# Altium PCB PCB1.PcbDoc (part 2 of 3)
Units mm, origin at the board's own origin, x right, y up, seen from the top; angles counter-clockwise.
Board outline 127.59 x 140.12 mm, 2 copper layers (Top Layer, Bottom Layer), stack 1.57 mm thick; 24 components, 13 nets, 167 pads, 3663 vias.
Unrouted connection lines stored in the file: 2.
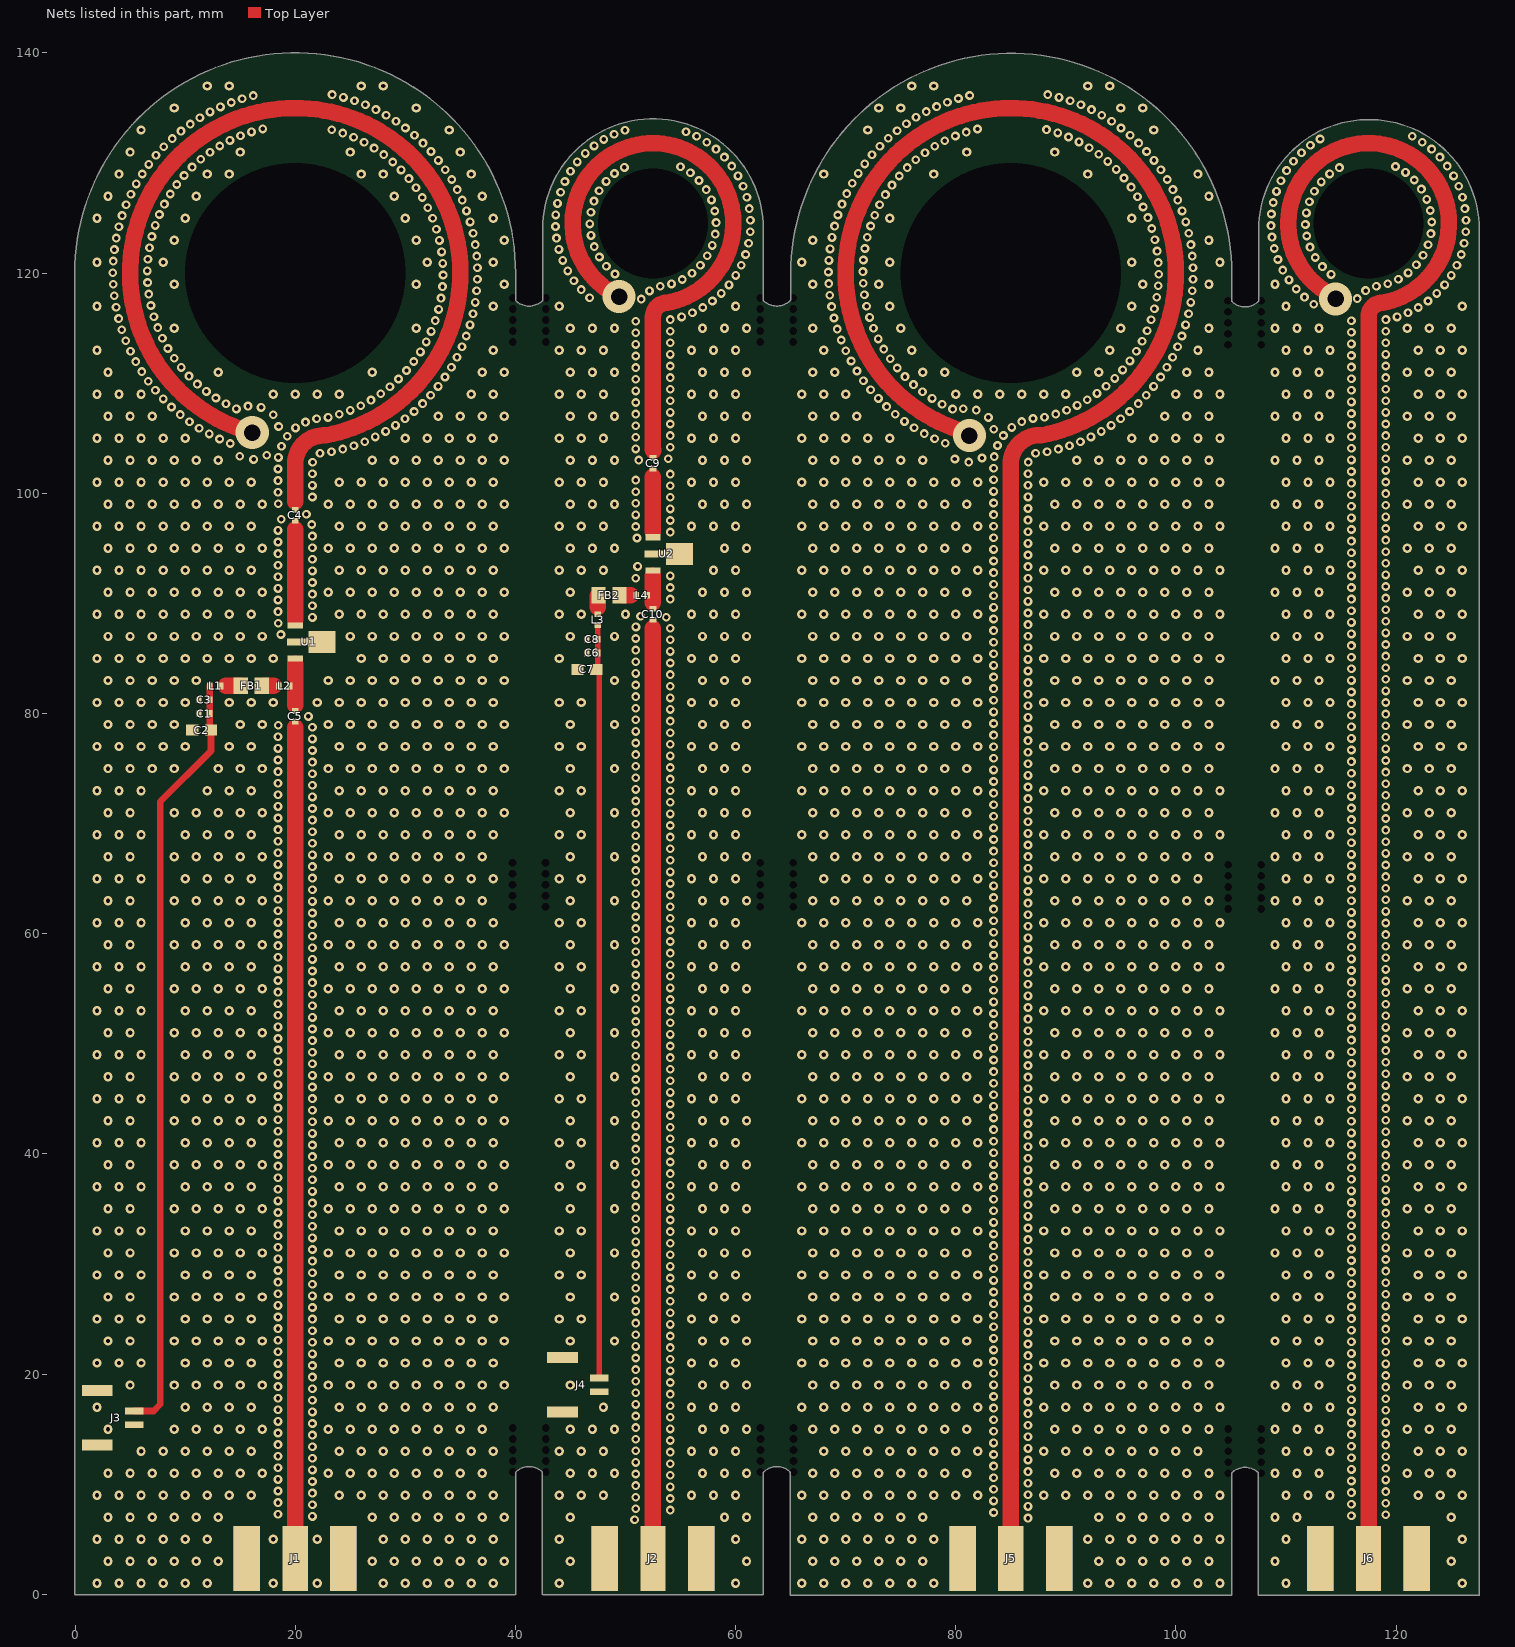
[diagram p2: the nets of this part, all layers, seen from the top]

## Via types
v1: diameter 0.85, hole 0.4, Top Layer to Bottom Layer, tented both sides, 2428 vias
v2: diameter 0.8, hole 0.4, Top Layer to Bottom Layer, tented both sides, 1231 vias
v3: diameter 3, hole 1.5, Top Layer to Bottom Layer, tented both sides, 4 vias

## Nets (pads, with @x,y where several pads share a name; then routed paths per layer and width w, separated by ;. In a path a pad name is that pad's centre, name@x,y a point inside that pad or via, vN(x,y) a via of type N, cw(c..) or ccw(c..) an arc to the next point about the centre after c; other vN are vias at no path point)
GND: C1.1 C2.1 C3.1 C4.2 C6.1 C7.1 C8.1 C9.2 J1.2 J2.2 J3.2 J3.MP1 J3.MP2 J4.2 J4.MP1 J4.MP2 J5.1 J5.2 J6.1 J6.2 pad.1@62.25,113.75 pad.1@65.25,113.75 U1.2 U2.2 | length 498.8
  Top Layer w0.5: C4.2@20,98.5 20,99.25
  Top Layer w1.5: v3(16.1,105.516) cw(c20,120) 22.749,105.254 22.565,105.254 ccw(c22.565,102.689) 20,102.689 20,99.25 ; v3(49.426,117.873) 49.415,117.884 cw(c52.5,124.5) 53.768,117.311 ccw(c53.768,116.043) 52.5,116.043 52.5,103.994 ccw(c54,103.994) 52.504,103.879 ; v3@81.1,105.516 cw(c85,120) 87.749,105.254 ; J5.1@85,3.25 85,102.681 cw(c87.592,102.681) 87.592,105.272 ; v3@114.415,117.884 cw(c117.5,124.5) 118.768,117.311 ccw(c118.768,116.043) 117.5,116.043 J6.1@117.5,3.25
  other v1: 2,1 4,1 6,1 8,1 10,1 12,1 18,1 22,1 28,1 30,1 32,1 34,1 36,1 38,1 44,1 60,1 66,1 68,1 70,1 72,1 74,1 76,1 78,1 92,1 94,1 96,1 98,1 100,1 102,1 104,1 110,1 126,1 3,3 5,3 7,3 9,3 11,3 13,3 27,3 29,3 31,3 33,3 35,3 37,3 39,3 45,3 61,3 67,3 69,3 71,3 73,3 75,3 77,3 93,3 95,3 97,3 99,3 101,3 103,3 109,3 125,3 2,5 4,5 6,5 8,5 10,5 12,5 18,5 22,5 28,5 30,5 32,5 34,5 36,5 38,5 44,5 60,5 66,5 68,5 70,5 72,5 74,5 76,5 78,5 92,5 94,5 96,5 98,5 100,5 102,5 104,5 110,5 126,5 3,7 5,7 7,7 9,7 11,7 13,7 27,7 29,7 31,7 33,7 35,7 37,7 39,7 45,7 59,7 61,7 67,7 69,7 71,7 73,7 75,7 77,7 93,7 95,7 97,7 99,7 101,7 103,7 109,7 111,7 125,7 2,9 4,9 6,9 8,9 10,9 12,9 14,9 16,9 24,9 26,9 28,9 30,9 32,9 34,9 36,9 38,9 44,9 46,9 48,9 56,9 58,9 60,9 66,9 68,9 70,9 72,9 74,9 76,9 78,9 80,9 82,9 88,9 90,9 92,9 94,9 96,9 98,9 100,9 102,9 104,9 110,9 112,9 114,9 122,9 124,9 126,9 3,11 5,11 7,11 9,11 11,11 13,11 15,11 17,11 23,11 25,11 27,11 29,11 31,11 33,11 35,11 37,11 45,11 47,11 49,11 57,11 59,11 61,11 67,11 69,11 71,11 73,11 75,11 77,11 79,11 81,11 89,11 91,11 93,11 95,11 97,11 99,11 101,11 103,11 109,11 111,11 113,11 121,11 123,11 125,11 6,13 8,13 10,13 12,13 14,13 16,13 24,13 26,13 28,13 30,13 32,13 34,13 36,13 38,13 44,13 46,13 48,13 56,13 58,13 60,13 68,13 70,13 72,13 74,13 76,13 78,13 80,13 82,13 88,13 90,13 92,13 94,13 96,13 98,13 100,13 102,13 110,13 112,13 114,13 122,13 124,13 126,13 3,15 9,15 11,15 13,15 15,15 17,15 23,15 25,15 27,15 29,15 31,15 33,15 35,15 37,15 45,15 47,15 49,15 57,15 59,15 61,15 67,15 69,15 71,15 73,15 75,15 77,15 79,15 81,15 89,15 91,15 93,15 95,15 97,15 99,15 101,15 103,15 109,15 111,15 113,15 121,15 123,15 125,15 2,17 10,17 12,17 14,17 16,17 24,17 26,17 28,17 30,17 32,17 34,17 36,17 38,17 48,17 56,17 58,17 60,17 66,17 68,17 70,17 72,17 74,17 76,17 78,17 80,17 82,17 88,17 90,17 92,17 94,17 96,17 98,17 100,17 102,17 104,17 110,17 112,17 114,17 122,17 124,17 126,17 5,19 9,19 11,19 13,19 15,19 17,19 23,19 25,19 27,19 29,19 31,19 33,19 35,19 37,19 39,19 45,19 57,19 59,19 61,19 67,19 69,19 71,19 73,19 75,19 77,19 79,19 81,19 89,19 91,19 93,19 95,19 97,19 99,19 101,19 103,19 109,19 111,19 113,19 121,19 123,19 125,19 2,21 4,21 6,21 10,21 12,21 14,21 16,21 24,21 26,21 28,21 30,21 32,21 34,21 36,21 38,21 56,21 58,21 60,21 66,21 68,21 70,21 72,21 74,21 76,21 78,21 80,21 82,21 88,21 90,21 92,21 94,21 96,21 98,21 100,21 102,21 104,21 110,21 112,21 114,21 122,21 124,21 126,21 3,23 5,23 9,23 11,23 13,23 15,23 17,23 23,23 25,23 27,23 29,23 31,23 33,23 35,23 37,23 39,23 45,23 49,23 57,23 59,23 61,23 67,23 69,23 71,23 73,23 75,23 77,23 79,23 81,23 89,23 91,23 93,23 95,23 97,23 99,23 101,23 103,23 109,23 111,23 113,23 121,23 123,23 125,23 2,25 4,25 6,25 10,25 12,25 14,25 16,25 24,25 26,25 28,25 30,25 32,25 34,25 36,25 38,25 44,25 46,25 56,25 58,25 60,25 66,25 68,25 70,25 72,25 74,25 76,25 78,25 80,25 82,25 88,25 90,25 92,25 94,25 96,25 98,25 100,25 102,25 104,25 110,25 112,25 114,25 122,25 124,25 126,25 3,27 5,27 9,27 11,27 13,27 15,27 17,27 23,27 25,27 27,27 29,27 31,27 33,27 35,27 37,27 39,27 45,27 49,27 57,27 59,27 61,27 67,27 69,27 71,27 73,27 75,27 77,27 79,27 81,27 89,27 91,27 93,27 95,27 97,27 99,27 101,27 103,27 109,27 111,27 113,27 121,27 123,27 125,27 2,29 4,29 6,29 10,29 12,29 14,29 16,29 24,29 26,29 28,29 30,29 32,29 34,29 36,29 38,29 44,29 46,29 56,29 58,29 60,29 66,29 68,29 70,29 72,29 74,29 76,29 78,29 80,29 82,29 88,29 90,29 92,29 94,29 96,29 98,29 100,29 102,29 104,29 110,29 112,29 114,29 122,29 124,29 126,29 3,31 5,31 9,31 11,31 13,31 15,31 17,31 23,31 25,31 27,31 29,31 31,31 33,31 35,31 37,31 39,31 45,31 49,31 57,31 59,31 61,31 67,31 69,31 71,31 73,31 75,31 77,31 79,31 81,31 89,31 91,31 93,31 95,31 97,31 99,31 101,31 103,31 109,31 111,31 113,31 121,31 123,31 125,31 2,33 4,33 6,33 10,33 12,33 14,33 16,33 24,33 26,33 28,33 30,33 32,33 34,33 36,33 38,33 44,33 46,33 56,33 58,33 60,33 66,33 68,33 70,33 72,33 74,33 76,33 78,33 80,33 82,33 88,33 90,33 92,33 94,33 96,33 98,33 100,33 102,33 104,33 110,33 112,33 114,33 122,33 124,33 126,33 3,35 5,35 9,35 11,35 13,35 15,35 17,35 23,35 25,35 27,35 29,35 31,35 33,35 35,35 37,35 39,35 45,35 49,35 57,35 59,35 61,35 67,35 69,35 71,35 73,35 75,35 77,35 79,35 81,35 89,35 91,35 93,35 95,35 97,35 99,35 101,35 103,35 109,35 111,35 113,35 121,35 123,35 125,35 2,37 4,37 6,37 10,37 12,37 14,37 16,37 24,37 26,37 28,37 30,37 32,37 34,37 36,37 38,37 44,37 46,37 56,37 58,37 60,37 66,37 68,37 70,37 72,37 74,37 76,37 78,37 80,37 82,37 88,37 90,37 92,37 94,37 96,37 98,37 100,37 102,37 104,37 110,37 112,37 114,37 122,37 124,37 126,37 3,39 5,39 9,39 11,39 13,39 15,39 17,39 23,39 25,39 27,39 29,39 31,39 33,39 35,39 37,39 39,39 45,39 49,39 57,39 59,39 61,39 67,39 69,39 71,39 73,39 75,39 77,39 79,39 81,39 89,39 91,39 93,39 95,39 97,39 99,39 101,39 103,39 109,39 111,39 113,39 121,39 123,39 125,39 2,41 4,41 6,41 10,41 12,41 14,41 16,41 24,41 26,41 28,41 30,41 32,41 34,41 36,41 38,41 44,41 46,41 56,41 58,41 60,41 66,41 68,41 70,41 72,41 74,41 76,41 78,41 80,41 82,41 88,41 90,41 92,41 94,41 96,41 98,41 100,41 102,41 104,41 110,41 112,41 114,41 122,41 124,41 126,41 3,43 5,43 9,43 11,43 13,43 15,43 17,43 23,43 25,43 27,43 29,43 31,43 33,43 35,43 37,43 39,43 45,43 49,43 57,43 59,43 61,43 67,43 69,43 71,43 73,43 75,43 77,43 79,43 81,43 89,43 91,43 93,43 95,43 97,43 99,43 101,43 103,43 109,43 111,43 113,43 121,43 123,43 125,43 2,45 4,45 6,45 10,45 12,45 14,45 16,45 24,45 26,45 28,45 30,45 32,45 34,45 36,45 38,45 44,45 46,45 56,45 58,45 60,45 66,45 68,45 70,45 72,45 74,45 76,45 78,45 80,45 82,45 88,45 90,45 92,45 94,45 96,45 98,45 100,45 102,45 104,45 110,45 112,45 114,45 122,45 124,45 126,45 3,47 5,47 9,47 11,47 13,47 15,47 17,47 23,47 25,47 27,47 29,47 31,47 33,47 35,47 37,47 39,47 45,47 49,47 57,47 59,47 61,47 67,47 69,47 71,47 73,47 75,47 77,47 79,47 81,47 89,47 91,47 93,47 95,47 97,47 99,47 101,47 103,47 109,47 111,47 113,47 121,47 123,47 125,47 2,49 4,49 6,49 10,49 12,49 14,49 16,49 24,49 26,49 28,49 30,49 32,49 34,49 36,49 38,49 44,49 46,49 56,49 58,49 60,49 66,49 68,49 70,49 72,49 74,49 76,49 78,49 80,49 82,49 88,49 90,49 92,49 94,49 96,49 98,49 100,49 102,49 104,49 110,49 112,49 114,49 122,49 124,49 126,49 3,51 5,51 9,51 11,51 13,51 15,51 17,51 23,51 25,51 27,51 29,51 31,51 33,51 35,51 37,51 39,51 45,51 49,51 57,51 59,51 61,51 67,51 69,51 71,51 73,51 75,51 77,51 79,51 81,51 89,51 91,51 93,51 95,51 97,51 99,51 101,51 103,51 109,51 111,51 113,51 121,51 123,51 125,51 2,53 4,53 6,53 10,53 12,53 14,53 16,53 24,53 26,53 28,53 30,53 32,53 34,53 36,53 38,53 44,53 46,53 56,53 58,53 60,53 66,53 68,53 70,53 72,53 74,53 76,53 78,53 80,53 82,53 88,53 90,53 92,53 94,53 96,53 98,53 100,53 102,53 104,53 110,53 112,53 114,53 122,53 124,53 126,53 3,55 5,55 9,55 11,55 13,55 15,55 17,55 23,55 25,55 27,55 29,55 31,55 33,55 35,55 37,55 39,55 45,55 49,55 57,55 59,55 61,55 67,55 69,55 71,55 73,55 75,55 77,55 79,55 81,55 89,55 91,55 93,55 95,55 97,55 99,55 101,55 103,55 109,55 111,55 113,55 121,55 123,55 125,55 2,57 4,57 6,57 10,57 12,57 14,57 16,57 24,57 26,57 28,57 30,57 32,57 34,57 36,57 38,57 44,57 46,57 56,57 58,57 60,57 66,57 68,57 70,57 72,57 74,57 76,57 78,57 80,57 82,57 88,57 90,57 92,57 94,57 96,57 98,57 100,57 102,57 104,57 110,57 112,57 114,57 122,57 124,57 126,57 3,59 5,59 9,59 11,59 13,59 15,59 17,59 23,59 25,59 27,59 29,59 31,59 33,59 35,59 37,59 39,59 45,59 49,59 57,59 59,59 61,59 67,59 69,59 71,59 73,59 75,59 77,59 79,59 81,59 89,59 91,59 93,59 95,59 97,59 99,59 101,59 103,59 109,59 111,59 113,59 121,59 123,59 125,59 2,61 4,61 6,61 10,61 12,61 14,61 16,61 24,61 26,61 28,61 30,61 32,61 34,61 36,61 38,61 44,61 46,61 56,61 58,61 60,61 66,61 68,61 70,61 72,61 74,61 76,61 78,61 80,61 82,61 88,61 90,61 92,61 94,61 96,61 98,61 100,61 102,61 104,61 110,61 112,61 114,61 122,61 124,61 126,61 3,63 5,63 9,63 11,63 13,63 15,63 17,63 23,63 25,63 27,63 29,63 31,63 33,63 35,63 37,63 45,63 49,63 57,63 59,63 61,63 67,63 69,63 71,63 73,63 75,63 77,63 79,63 81,63 89,63 91,63 93,63 95,63 97,63 99,63 101,63 103,63 109,63 111,63 113,63 121,63 123,63 125,63 2,65 4,65 6,65 10,65 12,65 14,65 16,65 24,65 26,65 28,65 30,65 32,65 34,65 36,65 38,65 44,65 46,65 56,65 58,65 60,65 68,65 70,65 72,65 74,65 76,65 78,65 80,65 82,65 88,65 90,65 92,65 94,65 96,65 98,65 100,65 102,65 110,65 112,65 114,65 122,65 124,65 126,65 3,67 5,67 9,67 11,67 13,67 15,67 17,67 23,67 25,67 27,67 29,67 31,67 33,67 35,67 37,67 45,67 49,67 57,67 59,67 61,67 67,67 69,67 71,67 73,67 75,67 77,67 79,67 81,67 89,67 91,67 93,67 95,67 97,67 99,67 101,67 103,67 109,67 111,67 113,67 121,67 123,67 125,67 2,69 4,69 6,69 10,69 12,69 14,69 16,69 24,69 26,69 28,69 30,69 32,69 34,69 36,69 38,69 44,69 46,69 56,69 58,69 60,69 66,69 68,69 70,69 72,69 74,69 76,69 78,69 80,69 82,69 88,69 90,69 92,69 94,69 96,69 98,69 100,69 102,69 104,69 110,69 112,69 114,69 122,69 124,69 126,69 3,71 5,71 9,71 11,71 13,71 15,71 17,71 23,71 25,71 27,71 29,71 31,71 33,71 35,71 37,71 39,71 45,71 49,71 57,71 59,71 61,71 67,71 69,71 71,71 73,71 75,71 77,71 79,71 81,71 89,71 91,71 93,71 95,71 97,71 99,71 101,71 103,71 109,71 111,71 113,71 121,71 123,71 125,71 2,73 4,73 6,73 12,73 14,73 16,73 24,73 26,73 28,73 30,73 32,73 34,73 36,73 38,73 44,73 46,73 56,73 58,73 60,73 66,73 68,73 70,73 72,73 74,73 76,73 78,73 80,73 82,73 88,73 90,73 92,73 94,73 96,73 98,73 100,73 102,73 104,73 110,73 112,73 114,73 122,73 124,73 126,73 3,75 5,75 7,75 9,75 13,75 15,75 17,75 23,75 25,75 27,75 29,75 31,75 33,75 35,75 37,75 39,75 45,75 49,75 57,75 59,75 61,75 67,75 69,75 71,75 73,75 75,75 77,75 79,75 81,75 89,75 91,75 93,75 95,75 97,75 99,75 101,75 103,75 109,75 111,75 113,75 121,75 123,75 125,75 2,77 4,77 6,77 8,77 10,77 14,77 16,77 24,77 26,77 28,77 30,77 32,77 34,77 36,77 38,77 44,77 46,77 56,77 58,77 60,77 66,77 68,77 70,77 72,77 74,77 76,77 78,77 80,77 82,77 88,77 90,77 92,77 94,77 96,77 98,77 100,77 102,77 104,77 110,77 112,77 114,77 122,77 124,77 126,77 3,79 5,79 7,79 9,79 15,79 17,79 23,79 25,79 27,79 29,79 31,79 33,79 35,79 37,79 39,79 45,79 49,79 57,79 59,79 61,79 67,79 69,79 71,79 73,79 75,79 77,79 79,79 81,79 89,79 91,79 93,79 95,79 97,79 99,79 101,79 103,79 109,79 111,79 113,79 121,79 123,79 125,79 2,81 4,81 6,81 8,81 10,81 14,81 16,81 18,81 22,81 24,81 26,81 28,81 30,81 32,81 34,81 36,81 38,81 44,81 46,81 56,81 58,81 60,81 66,81 68,81 70,81 72,81 74,81 76,81 78,81 80,81 82,81 88,81 90,81 92,81 94,81 96,81 98,81 100,81 102,81 104,81 110,81 112,81 114,81 122,81 124,81 126,81 3,83 5,83 7,83 9,83 11,83 23,83 25,83 27,83 29,83 31,83 33,83 35,83 37,83 39,83 49,83 57,83 59,83 61,83 67,83 69,83 71,83 73,83 75,83 77,83 79,83 81,83 89,83 91,83 93,83 95,83 97,83 99,83 101,83 103,83 109,83 111,83 113,83 121,83 123,83 125,83 2,85 4,85 6,85 8,85 10,85 12,85 14,85 16,85 18,85 26,85 28,85 30,85 32,85 34,85 36,85 38,85 44,85 56,85 58,85 60,85 66,85 68,85 70,85 72,85 74,85 76,85 78,85 80,85 82,85 88,85 90,85 92,85 94,85 96,85 98,85 100,85 102,85 104,85 110,85 112,85 114,85 122,85 124,85 126,85 3,87 5,87 7,87 9,87 11,87 13,87 15,87 17,87 25,87 27,87 29,87 31,87 33,87 35,87 37,87 39,87 45,87 49,87 57,87 59,87 61,87 67,87 69,87 71,87 73,87 75,87 77,87 79,87 81,87 89,87 91,87 93,87 95,87 97,87 99,87 101,87 103,87 109,87 111,87 113,87 121,87 123,87 125,87 2,89 4,89 6,89 8,89 10,89 12,89 14,89 16,89 24,89 26,89 28,89 30,89 32,89 34,89 36,89 38,89 44,89 46,89 50,89 56,89 58,89 60,89 66,89 68,89 70,89 72,89 74,89 76,89 78,89 80,89 82,89 88,89 90,89 92,89 94,89 96,89 98,89 100,89 102,89 104,89 110,89 112,89 114,89 122,89 124,89 126,89 3,91 5,91 7,91 9,91 11,91 13,91 15,91 17,91 23,91 25,91 27,91 29,91 31,91 33,91 35,91 37,91 39,91 45,91 57,91 59,91 61,91 67,91 69,91 71,91 73,91 75,91 77,91 79,91 81,91 89,91 91,91 93,91 95,91 97,91 99,91 101,91 103,91 109,91 111,91 113,91 121,91 123,91 125,91 2,93 4,93 6,93 8,93 10,93 12,93 14,93 16,93 24,93 26,93 28,93 30,93 32,93 34,93 36,93 38,93 44,93 46,93 48,93 58,93 60,93 66,93 68,93 70,93 72,93 74,93 76,93 78,93 80,93 82,93 88,93 90,93 92,93 94,93 96,93 98,93 100,93 102,93 104,93 110,93 112,93 114,93 122,93 124,93 126,93 3,95 5,95 7,95 9,95 11,95 13,95 15,95 17,95 23,95 25,95 27,95 29,95 31,95 33,95 35,95 37,95 39,95 45,95 47,95 49,95 59,95 61,95 67,95 69,95 71,95 73,95 75,95 77,95 79,95 81,95 89,95 91,95 93,95 95,95 97,95 99,95 101,95 103,95 109,95 111,95 113,95 121,95 123,95 125,95 2,97 4,97 6,97 8,97 10,97 12,97 14,97 16,97 24,97 26,97 28,97 30,97 32,97 34,97 36,97 38,97 44,97 46,97 48,97 56,97 58,97 60,97 66,97 68,97 70,97 72,97 74,97 76,97 78,97 80,97 82,97 88,97 90,97 92,97 94,97 96,97 98,97 100,97 102,97 104,97 110,97 112,97 114,97 122,97 124,97 126,97 3,99 5,99 7,99 9,99 11,99 13,99 15,99 17,99 23,99 25,99 27,99 29,99 31,99 33,99 35,99 37,99 39,99 45,99 47,99 49,99 57,99 59,99 61,99 67,99 69,99 71,99 73,99 75,99 77,99 79,99 81,99 89,99 91,99 93,99 95,99 97,99 99,99 101,99 103,99 109,99 111,99 113,99 121,99 123,99 125,99 2,101 4,101 6,101 8,101 10,101 12,101 14,101 16,101 24,101 26,101 28,101 30,101 32,101 34,101 36,101 38,101 44,101 46,101 48,101 56,101 58,101 60,101 66,101 68,101 70,101 72,101 74,101 76,101 78,101 80,101 82,101 88,101 90,101 92,101 94,101 96,101 98,101 100,101 102,101 104,101 110,101 112,101 114,101 122,101 124,101 126,101 3,103 5,103 7,103 9,103 11,103 13,103 27,103 29,103 31,103 33,103 35,103 37,103 39,103 45,103 47,103 49,103 57,103 59,103 61,103 67,103 69,103 71,103 73,103 75,103 77,103 91,103 93,103 95,103 97,103 99,103 101,103 103,103 109,103 111,103 113,103 121,103 123,103 125,103 2,105 4,105 6,105 8,105 10,105 30,105 32,105 34,105 36,105 38,105 44,105 46,105 48,105 56,105 58,105 60,105 66,105 68,105 70,105 72,105 74,105 96,105 98,105 100,105 102,105 104,105 110,105 112,105 114,105 122,105 124,105 126,105 3,107 5,107 7,107 33,107 35,107 37,107 39,107 45,107 47,107 49,107 57,107 59,107 61,107 67,107 69,107 71,107 99,107 101,107 103,107 109,107 111,107 113,107 121,107 123,107 125,107 2,109 4,109 6,109 18,109 20,109 22,109 24,109 36,109 38,109 44,109 46,109 48,109 56,109 58,109 60,109 66,109 68,109 70,109 80,109 82,109 84,109 86,109 88,109 90,109 100,109 102,109 104,109 110,109 112,109 114,109 122,109 124,109 126,109 3,111 13,111 27,111 37,111 39,111 45,111 47,111 49,111 57,111 59,111 61,111 67,111 69,111 77,111 79,111 91,111 93,111 101,111 103,111 109,111 111,111 113,111 121,111 123,111 125,111 2,113 38,113 44,113 46,113 48,113 56,113 58,113 60,113 68,113 76,113 94,113 102,113 110,113 112,113 114,113 122,113 124,113 126,113 9,115 31,115 45,115 47,115 49,115 57,115 59,115 61,115 67,115 75,115 95,115 103,115 109,115 111,115 113,115 121,115 123,115 125,115 2,117 38,117 44,117 60,117 74,117 96,117 110,117 126,117 9,119 31,119 39,119 67,119 73,119 97,119 103,119 109,119 2,121 8,121 32,121 38,121 66,121 74,121 96,121 104,121 9,123 31,123 39,123 67,123 103,123 2,125 10,125 30,125 38,125 74,125 96,125 3,127 11,127 29,127 37,127 103,127 4,129 12,129 14,129 26,129 28,129 36,129 68,129 78,129 92,129 102,129 5,131 15,131 25,131 35,131 81,131 89,131 6,133 34,133 72,133 98,133 9,135 31,135 73,135 75,135 95,135 97,135 12,137 14,137 26,137 28,137 76,137 78,137 92,137 94,137
  other v2: 50.83,6.763 86.563,6.92 21.563,7.075 115.937,7.123 119.063,7.219 18.437,7.268 83.437,7.425 54.063,7.643 50.937,7.76 86.563,7.974 21.563,8.129 115.937,8.177 119.063,8.273 18.437,8.322 83.437,8.479 54.063,8.697 50.937,8.814 86.563,9.028 21.563,9.183 115.937,9.231 119.063,9.327 18.437,9.376 83.437,9.533 54.063,9.751 50.937,9.868 86.563,10.082 21.563,10.237 115.937,10.285 119.063,10.381 18.437,10.43 83.437,10.587 54.063,10.805 50.937,10.922 86.563,11.136 21.563,11.291 115.937,11.339 119.063,11.435 18.437,11.484 83.437,11.641 54.063,11.859 50.937,11.976 86.563,12.19 21.563,12.345 115.937,12.393 119.063,12.489 18.437,12.538 83.437,12.695 54.063,12.913 50.937,13.03 86.563,13.244 21.563,13.399 115.937,13.447 119.063,13.543 18.437,13.592 83.437,13.749 54.063,13.967 50.937,14.084 86.563,14.298 21.563,14.453 115.937,14.501 119.063,14.597 18.437,14.646 83.437,14.803 54.063,15.021 50.937,15.138 86.563,15.352 21.563,15.507 115.937,15.555 119.063,15.651 18.437,15.7 83.437,15.857 54.063,16.075 50.937,16.192 86.563,16.406 21.563,16.561 115.937,16.609 119.063,16.705 18.437,16.754 83.437,16.911 54.063,17.129 50.937,17.246 86.563,17.46 21.563,17.615 115.937,17.663 119.063,17.759 18.437,17.808 83.437,17.965 54.063,18.183 50.937,18.3 86.563,18.514 21.563,18.669 115.937,18.717 119.063,18.813 18.437,18.862 83.437,19.019 54.063,19.237 50.937,19.354 86.563,19.568 21.563,19.723 115.937,19.771 119.063,19.867 18.437,19.916 83.437,20.073 54.063,20.291 50.937,20.408 86.563,20.622 21.563,20.777 115.937,20.825 119.063,20.921 18.437,20.97 83.437,21.127 54.063,21.345 50.937,21.462 86.563,21.676 21.563,21.831 115.937,21.879 119.063,21.975 18.437,22.024 83.437,22.181 54.063,22.399 50.937,22.516 86.563,22.73 21.563,22.885 115.937,22.933 119.063,23.029 18.437,23.078 83.437,23.235 54.063,23.453 50.937,23.57 86.563,23.784 21.563,23.939 115.937,23.987 119.063,24.083 18.437,24.132 83.437,24.289 54.063,24.507 50.937,24.624 86.563,24.838 21.563,24.993 115.937,25.041 119.063,25.137 18.437,25.186 83.437,25.343 54.063,25.561 50.937,25.678 86.563,25.892 21.563,26.047 115.937,26.095 119.063,26.191 18.437,26.24 83.437,26.397 54.063,26.615 50.937,26.732 86.563,26.946 21.563,27.101 115.937,27.149 119.063,27.245 18.437,27.294 83.437,27.451 54.063,27.669 50.937,27.786 86.563,28 21.563,28.155 115.937,28.203 119.063,28.299 18.437,28.348 83.437,28.505 54.063,28.723 50.937,28.84 86.563,29.054 21.563,29.209 115.937,29.257 119.063,29.353 18.437,29.402 83.437,29.559 54.063,29.777 50.937,29.894 86.563,30.108 21.563,30.263 115.937,30.311 119.063,30.407 18.437,30.456 83.437,30.613 54.063,30.831 50.937,30.948 86.563,31.162 21.563,31.317 115.937,31.365 119.063,31.461 18.437,31.51 83.437,31.667 54.063,31.885 50.937,32.002 86.563,32.216 21.563,32.371 115.937,32.419 119.063,32.515 18.437,32.564 83.437,32.721 54.063,32.939 50.937,33.056 86.563,33.27 21.563,33.425 115.937,33.473 119.063,33.569 18.437,33.618 83.437,33.775 54.063,33.993 50.937,34.11 86.563,34.324 21.563,34.479 115.937,34.527 119.063,34.623 18.437,34.672 83.437,34.829 54.063,35.047 50.937,35.164 86.563,35.378 21.563,35.533 115.937,35.581 119.063,35.677 18.437,35.726 83.437,35.883 54.063,36.101 50.937,36.218 86.563,36.432 21.563,36.587 115.937,36.635 119.063,36.731 18.437,36.78 83.437,36.937 54.063,37.155 50.937,37.272 86.563,37.486 21.563,37.641 115.937,37.689 119.063,37.785 18.437,37.834 83.437,37.991 54.063,38.209 50.937,38.326 86.563,38.54 21.563,38.695 115.937,38.743 119.063,38.839 18.437,38.888 83.437,39.045 54.063,39.263 50.937,39.38 86.563,39.594 21.563,39.749 115.937,39.797 119.063,39.893 18.437,39.942 83.437,40.099 54.063,40.317 50.937,40.434 86.563,40.648 21.563,40.803 115.937,40.851 119.063,40.947 18.437,40.996 83.437,41.153 54.063,41.371 50.937,41.488 86.563,41.702 21.563,41.857 115.937,41.905 119.063,42.001 18.437,42.05 83.437,42.207 54.063,42.425 50.937,42.542 86.563,42.756 21.563,42.911 115.937,42.959 119.063,43.055 18.437,43.104 83.437,43.261 54.063,43.479 50.937,43.596 86.563,43.81 21.563,43.965 115.937,44.013 119.063,44.109 18.437,44.158 83.437,44.315 54.063,44.533 50.937,44.65 86.563,44.864 21.563,45.019 115.937,45.067 119.063,45.163 18.437,45.212 83.437,45.369 54.063,45.587 50.937,45.704 86.563,45.918 21.563,46.073 115.937,46.121 119.063,46.217 18.437,46.266 83.437,46.423 54.063,46.641 50.937,46.758 86.563,46.972 21.563,47.127 115.937,47.175 119.063,47.271 18.437,47.32 83.437,47.477 54.063,47.695 50.937,47.812 86.563,48.026 21.563,48.181 115.937,48.229 119.063,48.325 18.437,48.374 83.437,48.531 54.063,48.749 50.937,48.866 86.563,49.08 21.563,49.235 115.937,49.283 119.063,49.379 18.437,49.428 83.437,49.585 54.063,49.803 50.937,49.92 86.563,50.134 21.563,50.289 115.937,50.337 119.063,50.433 18.437,50.482 83.437,50.639 54.063,50.857 50.937,50.974 86.563,51.188 21.563,51.343 115.937,51.391 119.063,51.487 18.437,51.536 83.437,51.693 54.063,51.911 50.937,52.028 86.563,52.242 21.563,52.397 115.937,52.445 119.063,52.541 18.437,52.59 83.437,52.747 54.063,52.965 50.937,53.082 86.563,53.296 21.563,53.451 115.937,53.499 119.063,53.595 18.437,53.644 83.437,53.801 54.063,54.019 50.937,54.136 86.563,54.35 21.563,54.505 115.937,54.553 119.063,54.649 18.437,54.698 83.437,54.855 54.063,55.073 50.937,55.19 86.563,55.404 21.563,55.559 115.937,55.607 119.063,55.703 18.437,55.752 83.437,55.909 54.063,56.127 50.937,56.244 86.563,56.458 21.563,56.613 115.937,56.661 119.063,56.757 18.437,56.806 83.437,56.963 54.063,57.181 50.937,57.298 86.563,57.512 21.563,57.667 115.937,57.715 119.063,57.811 18.437,57.86 83.437,58.017 54.063,58.235 50.937,58.352 86.563,58.566 21.563,58.721 115.937,58.769 119.063,58.865 18.437,58.914 83.437,59.071 54.063,59.289 50.937,59.406 86.563,59.62 21.563,59.775 115.937,59.823 119.063,59.919 18.437,59.968 83.437,60.125 54.063,60.343 50.937,60.46 86.563,60.674 21.563,60.829 115.937,60.877 119.063,60.973 18.437,61.022 83.437,61.179 54.063,61.397 50.937,61.514 86.563,61.728 21.563,61.883 115.937,61.931 119.063,62.027 18.437,62.076 83.437,62.233 54.063,62.451 50.937,62.568 86.563,62.782 21.563,62.937 115.937,62.985 119.063,63.081 18.437,63.13 83.437,63.287 54.063,63.505 50.937,63.622 86.563,63.836 21.563,63.991 115.937,64.039 119.063,64.135 18.437,64.184 83.437,64.341 54.063,64.559 50.937,64.676 86.563,64.89 21.563,65.045 115.937,65.093 119.063,65.189 18.437,65.238 83.437,65.395 54.063,65.613 50.937,65.73 86.563,65.944 21.563,66.099 115.937,66.147 119.063,66.243 18.437,66.292 83.437,66.449 54.063,66.667 50.937,66.784 86.563,66.998 21.563,67.153 115.937,67.201 119.063,67.297 18.437,67.346 83.437,67.503 54.063,67.721 50.937,67.838 86.563,68.052 21.563,68.207 115.937,68.255 119.063,68.351 18.437,68.4 83.437,68.557 54.063,68.775 50.937,68.892 86.563,69.106 21.563,69.261 115.937,69.309 119.063,69.405 18.437,69.454 83.437,69.611 54.063,69.829 50.937,69.946 86.563,70.16 21.563,70.315 115.937,70.363 119.063,70.459 18.437,70.508 83.437,70.665 54.063,70.883 50.937,71 86.563,71.214 21.563,71.369 115.937,71.417 119.063,71.513 18.437,71.562 83.437,71.719 54.063,71.937 50.937,72.054 86.563,72.268 21.563,72.423 115.937,72.471 119.063,72.567 18.437,72.616 83.437,72.773 54.063,72.991 50.937,73.108 86.563,73.322 21.563,73.477 115.937,73.525 119.063,73.621 18.437,73.67 83.437,73.827 54.063,74.045 50.937,74.162 86.563,74.376 21.563,74.531 115.937,74.579 119.063,74.675 18.437,74.724 83.437,74.881 54.063,75.099 50.937,75.216 86.563,75.43 21.563,75.585 115.937,75.633 119.063,75.729 18.437,75.778 83.437,75.935 54.063,76.153 50.937,76.27 86.563,76.484 21.563,76.639 115.937,76.687 119.063,76.783 18.437,76.832 83.437,76.989 54.063,77.207 50.937,77.324 86.563,77.538 21.563,77.693 115.937,77.741 119.063,77.837 18.437,77.886 83.437,78.043 54.063,78.261 50.937,78.378 86.563,78.592 21.563,78.747 115.937,78.795 119.063,78.891 18.455,78.94 83.437,79.097 54.063,79.315 50.937,79.432 86.563,79.646 21.205,79.738 115.937,79.849 119.063,79.945 83.437,80.151 54.063,80.369 50.937,80.486 86.563,80.7 115.937,80.903 119.063,80.999 83.437,81.205 54.063,81.423 50.937,81.54 86.563,81.754 115.937,81.957 119.063,82.053 83.437,82.259 54.063,82.477 50.937,82.594 86.563,82.808 115.937,83.011 119.063,83.107 83.437,83.313 54.063,83.531 50.937,83.648 86.563,83.862 115.937,84.065 119.063,84.161 83.437,84.367 54.063,84.585 50.937,84.702 86.563,84.916 115.937,85.119 119.063,85.215 83.437,85.421 54.063,85.639 50.937,85.756 86.563,85.97 115.937,86.173 119.063,86.269 83.437,86.475 54.063,86.693 50.937,86.81 86.563,87.024 18.704,87.178 115.937,87.227 119.063,87.323 83.437,87.529 54.063,87.747 50.945,87.864 86.563,88.078 18.468,88.205 115.937,88.281 119.063,88.377 83.437,88.583 21.563,88.734 53.705,88.738 51.375,88.826 86.563,89.132 18.437,89.259 115.937,89.335 119.063,89.431 83.437,89.637 21.563,89.788 86.563,90.186 18.437,90.313 54.063,90.389 115.937,90.389 119.063,90.485 83.437,90.691 21.563,90.842 86.563,91.24 18.437,91.367 54.063,91.443 115.937,91.443 119.063,91.539 83.437,91.745 21.563,91.896 50.937,92.279 86.563,92.294 18.437,92.421 54.063,92.497 115.937,92.497 119.063,92.593 83.437,92.799 21.563,92.95 51.102,93.359 86.563,93.348 18.437,93.475 115.937,93.551 119.063,93.647 83.437,93.853 21.563,94.004 86.563,94.402 18.437,94.529 115.937,94.605 119.063,94.701 83.437,94.907 21.563,95.058 86.563,95.456 18.437,95.583 115.937,95.659 119.063,95.755 51.046,95.942 83.437,95.961 21.563,96.112 54.06,96.477 86.563,96.51 18.437,96.637 115.937,96.713 119.063,96.809 50.937,96.99 83.437,97.015 21.5,97.165 54.063,97.531 86.563,97.564 18.728,97.65 115.937,97.767 119.063,97.863 50.937,98.044 83.437,98.069 21.02,98.103 54.063,98.585 86.563,98.618 115.937,98.821 119.063,98.917 18.457,99.045 50.937,99.098 83.437,99.123 54.063,99.639 21.563,99.664 86.563,99.672 115.937,99.875 119.063,99.971 18.437,100.099 50.937,100.152 83.437,100.177 54.063,100.693 21.563,100.718 86.563,100.726 115.937,100.929 119.063,101.025 18.437,101.153 50.937,101.206 83.437,101.231 54.063,101.747 21.563,101.772 86.563,101.78 115.937,101.983 119.063,102.079 18.437,102.207 83.437,102.285 21.578,102.826 81.19,102.837 86.58,102.834 51.204,103.018 115.937,103.037 16.225,103.082 79.923,103.121 119.063,103.133 53.881,103.149 82.382,103.207 18.475,103.26 83.49,103.337 14.957,103.365 17.417,103.452 22.254,103.635 87.252,103.646 23.298,103.775 88.298,103.775 24.324,104.017 89.324,104.017 50.937,104.038 115.937,104.091 54.063,104.187 119.063,104.187 18.761,104.275 25.334,104.32 90.334,104.32 83.792,104.347 14.107,104.526 79.05,104.548 26.322,104.686 91.322,104.686 13.135,104.933 78.079,104.959 50.937,105.092 27.28,105.125 92.28,105.125 115.937,105.145 19.282,105.191 54.063,105.241 119.063,105.241 84.332,105.252 12.189,105.398 77.135,105.428 28.21,105.621 93.21,105.621 83.459,105.827 11.273,105.919 20.024,105.939 76.221,105.953 85.082,105.993 18.494,106.071 50.937,106.146 29.108,106.173 94.108,106.173 115.937,106.199 54.063,106.295 119.063,106.295 20.932,106.474 10.396,106.504 86,106.511 75.345,106.538 21.944,106.77 29.971,106.778 87.014,106.796 94.971,106.778 22.99,106.901 82.966,106.896 88.062,106.915 9.561,107.147 18.001,107.14 24.007,107.176 50.937,107.2 74.512,107.185 89.078,107.196 115.937,107.253 54.063,107.349 119.063,107.349 30.797,107.433 95.797,107.433 25,107.529 90.069,107.555 81.872,107.563 79.718,107.646 14.661,107.673 80.675,107.68 16.907,107.807 8.765,107.838 73.72,107.88 15.709,107.924 25.962,107.96 91.029,107.99 78.766,108.098 13.711,108.129 31.571,108.149 96.571,108.149 50.937,108.254 115.937,108.307 54.063,108.403 119.063,108.403 26.888,108.464 91.951,108.5 8.013,108.576 72.971,108.621 77.852,108.624 12.8,108.659 32.298,108.912 97.298,108.912 27.771,109.04 92.831,109.08 76.982,109.219 11.933,109.258 50.937,109.308 7.306,109.358 115.937,109.361 72.268,109.407 54.063,109.457 119.063,109.457 28.606,109.683 32.977,109.718 97.977,109.718 93.663,109.727 76.162,109.881 11.115,109.923 6.654,110.186 71.615,110.234 50.937,110.362 29.388,110.389 115.937,110.415 94.441,110.438 54.063,110.511 119.063,110.511 33.607,110.563 98.607,110.563 75.395,110.605 10.353,110.651 6.062,111.058 71.028,111.109 30.113,111.155 95.162,111.207 74.689,111.386 50.937,111.416 9.649,111.436 34.185,111.444 99.185,111.444 115.937,111.469 54.063,111.565 119.063,111.565 5.524,111.964 30.775,111.975 70.494,112.018 95.82,112.031 74.045,112.221 9.01,112.274 34.7,112.364 99.7,112.364 50.937,112.47 115.937,112.523 54.063,112.619 119.063,112.619 31.371,112.844 5.041,112.901 96.411,112.903 70.015,112.957 73.469,113.104 8.438,113.159 35.151,113.317 100.151,113.317 50.937,113.524 115.937,113.577 54.063,113.673 119.063,113.673 31.897,113.757 96.932,113.82 4.615,113.866 69.594,113.923 72.964,114.029 7.937,114.087 35.543,114.295 100.543,114.295 50.937,114.578 115.937,114.631 32.35,114.709 54.063,114.727 119.063,114.727 97.38,114.774 4.251,114.855 69.232,114.913 72.533,114.991 7.511,115.051 35.876,115.295 100.876,115.295 50.937,115.632 115.937,115.685 32.726,115.693 97.751,115.76 54.071,115.781 119.071,115.781 3.962,115.868 68.946,115.928 72.178,115.983 7.161,116.045 55.095,116.031 120.095,116.031 36.148,116.313 101.148,116.313 56.083,116.398 121.083,116.398 33.025,116.704 98.044,116.773 57.021,116.879 122.021,116.879 3.736,116.898 68.724,116.958 71.903,117.001 6.891,117.064 112.512,117.179 36.354,117.347 101.354,117.347 57.895,117.468 122.895,117.468 51.437,117.647 116.467,117.692 33.243,117.736 46.741,117.769 98.257,117.805 111.678,117.824 3.571,117.939 68.564,118 71.708,118.037 6.701,118.1 58.693,118.156 123.693,118.156 36.482,118.393 52.186,118.388 101.482,118.393 117.23,118.419 45.983,118.501 110.927,118.564 33.38,118.781 53.154,118.807 118.207,118.815 98.388,118.851 59.404,118.934 124.404,118.934 3.47,118.988 54.186,119.022 119.237,119.037 68.468,119.049 71.595,119.085 6.593,119.149 45.317,119.318 110.268,119.386 55.16,119.423 36.548,119.445 101.548,119.445 120.208,119.449 60.014,119.794 125.014,119.794 33.434,119.833 98.437,119.904 114.093,119.891 49.049,119.922 56.048,119.991 121.091,120.024 3.432,120.041 68.434,120.103 71.565,120.138 6.567,120.203 44.752,120.208 109.712,120.282 36.55,120.499 101.55,120.499 113.307,120.593 48.271,120.633 60.52,120.719 125.52,120.719 56.808,120.721 121.844,120.761 33.406,120.887 98.403,120.957 3.473,121.094 44.297,121.159 68.476,121.156 71.617,121.191 109.265,121.236 6.624,121.255 112.657,121.423 47.628,121.468 36.489,121.551 101.489,121.551 57.43,121.573 122.456,121.62 60.91,121.698 125.91,121.698 33.295,121.935 98.287,122.005 3.581,122.143 43.958,122.157 68.588,122.204 71.751,122.236 108.935,122.237 6.764,122.3 112.182,122.364 47.162,122.413 57.884,122.524 36.361,122.597 101.361,122.597 122.905,122.573 61.181,122.717 126.181,122.717 33.103,122.971 98.089,123.04 3.752,123.183 43.739,123.188 68.764,123.243 71.967,123.268 108.725,123.27 6.985,123.33 111.879,123.373 46.87,123.426 58.15,123.544 123.159,123.596 36.159,123.632 101.159,123.632 61.329,123.76 126.329,123.76 32.829,123.989 97.81,124.056 3.985,124.211 43.644,124.238 69.002,124.27 72.264,124.279 108.639,124.321 7.286,124.34 111.765,124.421 46.762,124.475 58.234,124.594 35.891,124.651 100.891,124.651 123.231,124.648 61.353,124.814 126.353,124.814 32.477,124.983 97.453,125.048 4.279,125.223 72.638,125.265 69.301,125.281 43.674,125.291 7.665,125.324 108.678,125.374 111.853,125.471 46.861,125.524 58.119,125.642 35.562,125.653 100.562,125.653 123.11,125.695 61.252,125.863 126.252,125.863 32.048,125.945 97.019,126.008 4.644,126.212 73.089,126.217 8.121,126.274 69.665,126.27 43.828,126.334 108.842,126.415 112.122,126.49 47.142,126.54 35.174,126.633 100.174,126.633 57.812,126.65 122.791,126.7 31.545,126.871 61.028,126.893 126.028,126.893 96.511,126.932 73.613,127.132 5.075,127.173 8.649,127.186 70.101,127.229 44.104,127.351 109.133,127.428 112.578,127.441 47.604,127.487 34.727,127.587 57.334,127.59 99.727,127.587 122.303,127.634 30.971,127.755 95.932,127.813 60.683,127.889 125.683,127.889 74.207,128.002 9.247,128.054 5.564,128.107 70.594,128.161 113.202,128.29 44.502,128.327 48.237,128.33 109.537,128.402 56.683,128.419 121.647,128.459 34.212,128.507 99.212,128.507 30.329,128.591 95.286,128.646 60.223,128.837 74.867,128.824 125.223,128.837 9.912,128.872 6.108,129.01 113.964,129.018 49.008,129.049 71.142,129.062 55.894,129.118 120.851,129.149 45.011,129.25 110.058,129.317 29.624,129.375 33.638,129.391 98.638,129.391 94.577,129.425 75.59,129.591 114.853,129.584 49.9,129.61 10.638,129.636 54.995,129.668 119.946,129.689 59.653,129.724 124.653,129.724 6.705,129.879 71.743,129.927 28.859,130.1 45.629,130.104 93.809,130.147 110.685,130.165 33.012,130.238 98.012,130.238 76.371,130.299 11.423,130.34 58.983,130.537 123.983,130.537 7.357,130.707 28.04,130.764 72.398,130.753 92.986,130.806 46.345,130.878 77.205,130.944 111.407,130.933 12.26,130.981 32.336,131.047 97.336,131.047 58.221,131.266 123.221,131.266 27.172,131.361 92.115,131.399 8.069,131.484 73.111,131.53 78.086,131.521 13.144,131.554 47.147,131.562 112.215,131.61 31.612,131.813 96.612,131.813 26.259,131.888 57.378,131.899 122.378,131.899 91.199,131.921 79.011,132.028 14.071,132.056 48.024,132.146 113.097,132.186 8.826,132.218 73.871,132.26 25.308,132.342 90.246,132.371 56.467,132.427 121.467,132.427 79.972,132.46 15.034,132.483 30.838,132.529 95.838,132.529 48.964,132.622 24.324,132.72 89.26,132.744 16.028,132.834 80.964,132.816 55.499,132.845 9.625,132.904 74.674,132.943 49.954,132.984 23.313,133.02 88.248,133.038 17.047,133.106 81.981,133.093 30.015,133.188 95.015,133.188 10.465,133.542 75.516,133.576 29.155,133.796 94.155,133.796 11.343,134.124 76.395,134.158 28.259,134.351 93.259,134.351 12.261,134.642 77.315,134.673 27.331,134.852 92.331,134.852 13.21,135.101 78.266,135.127 26.374,135.293 91.374,135.293 14.185,135.502 79.242,135.524 25.386,135.661 90.386,135.661 15.182,135.844 80.241,135.861 24.378,135.968 89.378,135.968 16.198,136.125 81.258,136.137 23.353,136.214 88.353,136.214
  other v3: 81.25,105.25 114.512,117.668
NetC4_1: C4.1 U1.1 | length 9
  Top Layer w0.5: 20,96.75 C4.1@20,97.5
  Top Layer w1.5: 20,88.5 20,96.75
NetC5_1: C5.1 J1.1 | length 75.5
  Top Layer w1.5: J1.1@20,3.25 20,78.75
NetC5_2: C5.2 L2.1 U1.3 | length 4.3
  Top Layer w0.5: C5.2@20,80.25 20,80.75
  Top Layer w1.5: 20,80.75 20,84.5
NetC9_1: C9.1 U2.1 | length 5.7
  Top Layer w0.5: 52.5,101.5 52.5,102.229 C9.1@52.504,102.229
  Top Layer w1.5: 52.5,96.5 52.5,101.5
NetC10_1: C10.1 J2.1 | length 84.5
  Top Layer w1.5: J2.1@52.5,3.25 52.5,87.75
NetC10_2: C10.2 L4.1 U2.3 | length 2.5
  Top Layer w1.5: 52.5,90.045 52.5,92.5
NetFB1_1: FB1.1 L2.2 | length 0.8
  Top Layer w1.5: FB1.1@17.25,82.5 18.05,82.5
NetFB1_2: FB1.2 L1.1 | length 1.3
  Top Layer w1.5: 13.7,82.5 FB1.2@15.05,82.5
NetFB2_1: FB2.1 L4.2 | length 1
  Top Layer w0.5: FB2.1@49.45,90.75 FB2.1@49.75,90.75
  Top Layer w1.5: FB2.1@49.75,90.75 50.5,90.75
NetFB2_2: FB2.2 L3.1 | length 1
  Top Layer w1.5: 47.5,89.65 FB2.2@47.5,90.7
VCC_1: C1.2 C2.2 C3.2 J3.1 L1.2 | length 69.8
  Top Layer w0.6: J3.1@5.373,16.645 7.145,16.645 7.75,17.25 7.75,72 12.35,76.6 C2.2@12.35,78.5 12.25,78.6 C1.2@12.25,80 C3.2@12.25,81.25 L1.2@12.25,82.5
VCC_2: C6.2 C7.2 C8.2 J4.1 L3.2 | length 68.6
  Top Layer w0.5: L3.2@47.5,88 C8.2@47.5,86.75 C6.2@47.5,85.5 47.5,84.15 cw(c47.35,84.15) C7.2@47.35,84 cw(c47.35,83.727) 47.623,83.727 J4.1@47.623,19.645

## Polygon pours and split planes (outlines as drawn)
GND on Top Layer "GND" (solid, remove dead copper, pour order 6): 107.525,-0.061 107.543,123.939 cw(c117.543,123.939) 127.543,123.939 127.543,123.938 127.543,-0.061
GND on Top Layer "GND" (solid, remove dead copper, pour order 5): 65.01,-0.057 65.01,119.943 cw(c85.01,119.943) 105.01,119.943 105.01,-0.057
GND on Top Layer "GND" (solid, remove dead copper, pour order 2): 42.482,0 42.5,124 cw(c52.5,124) 62.5,124 62.5,123.999 62.5,0
GND on Top Layer "GND" (solid, remove dead copper, pour order 1): 0,0 0,120 cw(c20,120) 40,120 40,0
GND on Bottom Layer "GND" (solid, remove dead copper, pour order 7): 42.482,0 42.5,124 cw(c52.5,124) 62.5,124 62.5,123.999 62.5,0
GND on Bottom Layer "GND" (solid, remove dead copper, pour order 4): 107.525,-0.061 107.543,123.939 cw(c117.543,123.939) 127.543,123.939 127.543,123.938 127.543,-0.061
GND on Bottom Layer "GND" (solid, remove dead copper, pour order 3): 65.01,-0.057 65.01,119.943 cw(c85.01,119.943) 105.01,119.943 105.01,-0.057
GND on Bottom Layer "GND" (solid, remove dead copper, pour order 0): 0,0 0,120 cw(c20,120) 40,120 40,0

## Keep-outs
Top Layer:
  circle w0.254: c114.512,117.668 r1.306
  circle w0.254: c81.25,105.25 r1.346
  circle w0.254: c49.426,117.873 r1.268
  circle w0.254: c16.1,105.516 r1.35
Keep-Out Layer:
  rectangle: 115.75,126.142 119.25,136.392
  rectangle: 82.5,129.875 87.5,140.125
  rectangle: 50.75,125.17 54.25,135.42
  rectangle: 17.5,130 22.5,140.25

## Silkscreen, mask and mechanical layers (free items; w line width, h text height)
Top Overlay:
  text "Sylvain Rouland" at 61.315,4 h5 r90
  text "Sylvain Rouland" at 126.315,3 h5 r90
  text "Sylvain Rouland" at 102.721,2.268 h5 r90
  text "Sylvain Rouland" at 36.315,2 h5 r90
Top Solder:
  text "H-Field Probe" at 37.898,30 h10 r90
  text "H-Field Probe" at 60.898,30 h10 r90
  text "H-Field Probe" at 102.898,30 h10 r90
  text "H-Field Probe" at 125.648,30 h10 r90
Bottom Solder:
  lines w1: 3.181,37.799 36.181,37.799 ; 47,34 58,34 ; 47,67 58,67 ; 69,38 102,38 ; 112.699,34.007 123.699,34.007 ; 112.699,67.007 123.699,67.007
  text "∂t" at 47.056,105 h5 r270
  text "__" at 52.884,105 h5 r270
  text "∂E" at 54,105 h5 r270
  text "∂t" at 112.754,105.007 h5 r270
  text "__" at 118.583,105.007 h5 r270
  text "∂E" at 119.699,105.007 h5 r270
  text "1" at 54,100 h5 r270
  text "1" at 119.699,100.007 h5 r270
  text "c²" at 112.75,99.007 h5 r270
  text "_" at 118.583,99.007 h5 r270
  text "c²" at 47.051,99 h5 r270
  text "_" at 52.884,99 h5 r270
  text "___" at 77.067,95.386 h4 r270
  text "∂t" at 69.989,95.306 h8 r270
  text "___" at 11.249,95.185 h4 r270
  text "∂t" at 4.17,95.106 h8 r270
  text "∂E" at 78.401,94.406 h8 r270
  text "∂E" at 12.582,94.206 h8 r270
  text "0" at 49.024,89 h2 r270
  text "0" at 114.723,89.007 h2 r270
  text "1" at 79.001,87.706 h8 r270
  text "1" at 13.182,87.506 h8 r270
  text "µ J +" at 50.889,87 h5 r270
  text "µ J +" at 116.587,87.007 h5 r270
  text "___" at 76.908,86.406 h4 r270
  text "___" at 11.089,86.206 h4 r270
  text "c²" at 68.782,85.706 h8 r270
  text "c²" at 2.963,85.506 h8 r270
  text "=" at 116.894,83.007 h5 r270
  text "=" at 51.195,83 h5 r270
  text "x B" at 51,75 h5 r270
  text "x B" at 116.699,75.007 h5 r270
  text "Δ" at 54,74 h5 r90
  text "Δ" at 119.699,74.007 h5 r90
  text "0" at 71.103,72.558 h4 r270
  text "0" at 5.284,72.357 h4 r270
  text "___" at 94.23,71.117 h4 r270
  text "∂t" at 87.152,71.037 h8 r270
  text "___" at 28.285,70.886 h4 r270
  text "∂t" at 21.207,70.806 h8 r270
  text "∂B" at 95.563,70.137 h8 r270
  text "∂B" at 29.618,69.906 h8 r270
  text "µ J +" at 73.923,69.006 h8 r270
  text "µ J +" at 8.104,68.806 h8 r270
  text "-" at 95.314,67.231 h8 r90
  text "-" at 29.37,67 h8 r90
  text "=" at 90.849,61.807 h8 r270
  text "=" at 73.112,61.706 h8 r270
  text "=" at 25.03,61.606 h8 r270
  text "=" at 7.293,61.506 h8 r270
  text "∂t" at 48.056,59 h5 r270
  text "∂t" at 113.754,59.007 h5 r270
  text "__" at 119.583,58.007 h5 r270
  text "∂B" at 120.699,58.007 h5 r270
  text "__" at 53.884,58 h5 r270
  text "∂B" at 55,58 h5 r270
  text "-" at 119.685,56 h4 r90
  text "-" at 54.129,55.659 h4 r90
  text "=" at 51.195,52 h5 r270
  text "=" at 116.894,52.007 h5 r270
  text "x E" at 91.637,48.307 h8 r270
  text "x B" at 73.901,48.206 h8 r270
  text "x E" at 25.819,48.106 h8 r270
  text "x B" at 8.082,48.006 h8 r270
  text "Δ" at 96.737,46.807 h8 r90
  text "Δ" at 79.001,46.706 h8 r90
  text "Δ" at 30.918,46.606 h8 r90
  text "Δ" at 13.182,46.506 h8 r90
  text "x E" at 51,44 h5 r270
  text "x E" at 116.699,44.007 h5 r270
  text "Δ" at 54,43 h5 r90
  text "Δ" at 119.699,43.007 h5 r90
  text "0" at 86.31,32.688 h4 r270
  text "0" at 20.491,32.487 h4 r270
  text "ρ" at 97.161,30.088 h8 r270
  text "ρ" at 31.342,29.887 h8 r270
  text "ϵ" at 88.261,29.788 h8 r270
  text "ϵ" at 22.442,29.587 h8 r270
  text "___" at 94.769,28.688 h4 r270
  text "___" at 28.95,28.487 h4 r270
  text "0" at 50.036,27 h3 r270
  text "0" at 115.735,27.007 h3 r270
  text "= 0" at 74.558,25.156 h8 r270
  text "ϵ" at 52,25 h5 r270
  text "ρ" at 59,25 h5 r270
  text "ϵ" at 117.699,25.007 h5 r270
  text "ρ" at 124.699,25.007 h5 r270
  text "= 0" at 8.739,24.955 h8 r270
  text "=" at 91.673,23.588 h8 r270
  text "=" at 25.854,23.387 h8 r270
  text "__" at 122.583,23.007 h5 r270
  text "__" at 56.884,23 h5 r270
  text "= 0" at 109.402,19.962 h5 r270
  text "= 0" at 43.703,19.955 h5 r270
  text "=" at 54.337,19.387 h5 r270
  text "=" at 120.036,19.394 h5 r270
  text ". E" at 91.961,13.888 h8 r270
  text ". B" at 74.162,13.756 h8 r270
  text ". E" at 26.142,13.687 h8 r270
  text ". B" at 8.343,13.555 h8 r270
  text "Δ" at 97.061,13.488 h8 r90
  text "Δ" at 31.242,13.287 h8 r90
  text "Δ" at 79.162,13.156 h8 r90
  text ". B" at 44,13 h5 r270
  text "Δ" at 47,13 h5 r90
  text ". E" at 54,13 h5 r270
  text "Δ" at 57,13 h5 r90
  text ". B" at 109.699,13.007 h5 r270
  text "Δ" at 112.699,13.007 h5 r90
  text ". E" at 119.699,13.007 h5 r270
  text "Δ" at 122.699,13.007 h5 r90
  text "Δ" at 13.343,12.955 h8 r90
Notes:
  drawing of 298 lines, arcs and shapes, not listed
  text "PCB DESIGN INFORMATION" at 304.614,151.421 h3
  text "1" at 12.021,151.36 h3.5
  text "2" at 85.046,151.36 h3.5
  text "3" at 159.396,151.285 h3.5
  text "4" at 232.421,151.285 h3.5
  text "Type 1      Single-Sided Printed Board" at 296.068,144.47 h3
  text "GENERAL" at 274.717,144.011 h3
  text "Type 2      Double-Sided Printed Board" at 296.068,141.93 h3
  text "X" at 304.464,141.819 h3
  text "PCB" at 278.019,140.836 h3
  text "Type 3      Multilayer Board without Blind or Buried Vias" at 296.03,139.225 h3
  text "SPECIFICATION" at 271.542,137.534 h3
  text "Type 4      Multilayer Board with Blind or Buried Vias" at 296.118,136.55 h3
  text "A" at -22.091,128.511 h3.5
  text "A" at 264.929,128.511 h3.5
  text "FR4  UL94V-0 TG 135" at 295.233,127.805 h3
  text "PCB MATERIAL" at 271.669,127.628 h3
  text "BOTTOM" at 353.251,122.401 h3
  text "X" at 332.63,122.325 h3
  text "SILKSCREEN" at 294.268,122.28 h3
  text "NONE" at 319.534,122.28 h3
  text "TOP" at 335.534,122.28 h3
  text "- -" at 347.434,119.597 h3
  text "X" at 316.63,119.425 h3
  text "COLOR" at 301.534,119.28 h3
  text "WHITE" at 319.534,119.28 h3
  text "OTHER :" at 335.534,119.28 h3
  text "SURFACE FINISH :" at 295.118,113.905 h3
  text "X" at 295.086,110.711 h3
  text "electroless nickel / immersion gold" at 306.607,110.584 h3
  text "ENIG" at 298.407,110.507 h3
  text "BOARD" at 276.863,108.654 h3
  text "HAL LEADFREE" at 298.407,107.378 h3
  text "FINISH" at 276.863,104.654 h3
  text "IMMERSION SILVER" at 297.884,104.155 h3
  text "OTHER :" at 298.382,101.028 h3
  text "SOLDERMASK" at 294.251,94.401 h3
  text "RED" at 354.369,94.316 h3
  text "GREEN" at 320.651,94.195 h3
  text "YELLOW" at 336.651,94.195 h3
  text "COLOR" at 302.651,91.195 h3
  text "BLUE" at 320.651,91.195 h3
  text "WHITE" at 336.651,91.195 h3
  text "X" at 351.753,90.994 h3
  text "BLACK" at 354.36,90.987 h3
  text "127.5" at 304,85 h3
  text "140" at 314.584,84.865 h3
  text "X" at 311.981,84.823 h3
  text "MM" at 322.981,84.823 h3
  text "SIZE :" at 293.418,84.803 h3
  text "B" at 264.804,83.557 h3.5
  text "BOARD THICKNESS :" at 293.418,81.553 h3
  text "+-10%" at 321,81.072 h3
  text "B" at -22.091,80.251 h3.5
  text "PCB" at 278.251,79.901 h3
  text "X" at 320.353,78.555 h3
  text "0.8 mm" at 305.656,78.339 h3
  text "1.6 mm" at 323.656,78.339 h3
  text "OTHER :" at 341.656,78.339 h3
  text "DETAILS" at 276.251,75.901 h3
  text "2" at 327.584,75.255 h3
  text "NUMBER OF LAYERS :" at 293.418,75.205 h3
  text "0.21" at 323.909,71.634 h3
  text "MIN TRACK WIDTH :" at 293.406,71.584 h3
  text "MM" at 331.009,71.584 h3
  text "0.21" at 321.409,67.834 h3
  text "MIN CLEARANCE :" at 293.509,67.784 h3
  text "MM" at 328.509,67.784 h3
  text ".Via_Count" at 311.359,62.083 h3
  text ".Hole_Count" at 353.107,62.065 h3
  text "VIA COUNT:" at 293.696,62.019 h3
  text "TOTAL HOLE COUNT:" at 324.459,62.019 h3
  text "PCB" at 278.751,60.901 h3
  text "0.3" at 310.366,59.076 h3
  text "MIN DRILL :" at 293.693,59.005 h3
  text "MM" at 316.459,59.005 h3
  text "MAX DRILL :" at 324.959,59.005 h3
  text "MM" at 348.459,59.005 h3
  text "4.2" at 342.419,58.942 h3
  text "DRILLING" at 275.751,56.401 h3
  text "PLUGGED VIAS" at 297.786,55.355 h3
  text "17µm" at 319.048,47.858 h3
  text "INNER POWER" at 293.894,47.745 h3
  text "70µm" at 347.126,47.524 h3
  text "35µm" at 333.274,47.427 h3
  text "COPPER" at 274.251,47.401 h3
  text "X" at 329.892,47.39 h3
  text "- -" at 359.751,46.901 h3
  text "17µm" at 318.885,45.003 h3
  text "INNER SIGNAL" at 293.894,44.57 h3
  text "70µm" at 346.963,44.555 h3
  text "35µm" at 333.111,44.459 h3
  text "X" at 329.892,44.39 h3
  text "- -" at 359.751,43.901 h3
  text "THICKNESS" at 272.751,43.401 h3
  text "17µm" at 318.885,42.003 h3
  text "70µm" at 346.963,41.555 h3
  text "35µm" at 333.111,41.459 h3
  text "OUTER" at 303.33,41.425 h3
  text "X" at 329.892,41.39 h3
  text "- -" at 359.751,40.401 h3
  text "Layer" at 295.751,34.464 h3
  text "Spacing" at 340.251,34.464 h3
  text "Target" at 355.251,34.464 h3
  text "Reference" at 308.251,34.431 h3
  text "Width" at 327.251,34.431 h3
  text "C" at 264.779,34.347 h3.5
  text "C" at -22.091,31.991 h3.5
  text "CONTROLLED" at 272.177,30.347 h3
  text "IMPEDANCE" at 273.574,27.045 h3
  text "X" at 293.76,17.636 h3
  text "IPC-A-600 CLASS" at 297.26,17.486 h3
  text "3" at 337.751,17.434 h3
  text "2" at 326.748,17.401 h3
  text "X" at 323.229,17.377 h3
  text "UL" at 297.277,14.09 h3
  text "ELECTRICAL TEST" at 318.649,13.9 h3
  text "SPECIFIC" at 274.251,13.534 h3
  text "REQUIREMENT" at 271.751,10.651 h3
  text "ROHS" at 297.26,10.486 h3
  text "--" at 318.632,10.296 h3
  text "X" at 293.72,7.157 h3
  text "Lead Free" at 297.277,7.09 h3
  text "--" at 318.649,6.9 h3
  text "ON TOP ONLY, WHERE SHOWN ON THIS LAYER" at 299.251,0.281 h3
  text "SUPPLIER" at 275.251,-4.366 h3
  text "UL" at 297.466,-4.943 h3
  text "DATE   JJ/MM/AAAA" at 318.838,-5.133 h3
  text "MARKING" at 275.551,-7.666 h3
  text "ROHS" at 297.449,-8.547 h3
  text "--" at 318.821,-8.737 h3
  text "Lead Free" at 297.466,-11.943 h3
  text "--" at 318.838,-12.133 h3
  text "D" at -22.091,-16.269 h3.5
  text "D" at 264.929,-16.269 h3.5
  text "EDGE PLATING" at 297.2,-18.111 h3
  text "ADDITIONNAL" at 272.251,-20.566 h3
  text "DRAWN:" at 106.658,-20.753 h3
  text "'.CAD_Engineer1'" at 126.488,-20.753 h3
  text ".Customer" at 242,-20.967 h3
  text "Kickmaker" at 217,-21.5 h4
  text "ADHESIVE" at 297.183,-21.715 h3
  text "Number:" at 165.748,-21.787 h3.5
  text ".PCB_PN" at 178.5,-21.967 h3
  text "MECHANICAL:" at 106.658,-24.503 h3
  text "'.MECH_Engineer1'" at 126.488,-24.503 h2.2
  text "--/--/----" at 147.998,-24.503 h3
  text "SPECIFICATION" at 271.251,-24.566 h3
  text ".BoardName" at 241,-24.969 h3
  text "GOLD FINGER" at 297.2,-25.111 h3
  text "59 boulevard du Général Martial Valin" at 212.547,-26.119 h2.6
  text "Revision:" at 165.748,-26.787 h3.5
  text "Sheet" at 189.748,-26.787 h3.5
  text "1 of 1" at 201.248,-26.787 h3.5
  text ".BoardRevision" at 180,-26.969 h3
  text "--/--/----" at 147.998,-28.313 h3
  text "75015" at 220.867,-28.321 h2.6
  text "ELECTRICAL:" at 106.658,-28.503 h3
  text ".HardwareDesigner" at 126.488,-28.503 h2.2
  text "THIS DOCUMENT IS THE PROPERTY OF KICKMAKER" at 0.572,-28.574 h3.56
  text "PARIS" at 220.661,-30.332 h2.6
  text "Date:" at 165.748,-31.787 h3.5
  text "Size:" at 196.748,-31.787 h3.5
  text "A4" at 204.748,-31.787 h3.5
  text "'.Print_Date'" at 175.873,-31.862 h3.5
  text "REPRODUCTION OR DISCLOSURE IS FORBIDDEN UNLESS AUTHORISED." at -12.802,-32.137 h3.56
  text "--/--/----" at 147.871,-32.123 h3
  text "APPROVED:" at 106.658,-32.253 h3
  text "'.VAL_Engineer'" at 126.488,-32.253 h2.2
  text "FRANCE" at 219.377,-32.332 h2.6
  text "1" at 12.021,-36.6 h3.5
  text "2" at 85.046,-36.6 h3.5
  text "3" at 158.071,-36.6 h3.5
  text "4" at 231.096,-36.6 h3.5
  text "UNLESS OTHERWISE STATED, ALL DIMENSIONS IN MILLIMETRES" at 270,-37.556 h3.5
  text "COMPONENTS NOT LISTED IN NOMENCLATURE ARE UNASSEMBLED" at 275,-42 h3